# Altium PCB PCB_Switching_2022-05-04.pcbdoc
Units mm, origin at the board's own origin, x right, y up, seen from the top; angles counter-clockwise.
Board outline 185.17 x 149.14 mm, 2 copper layers (Top Layer, Bottom Layer); 16 components, 19 nets, 86 pads, 6 vias.
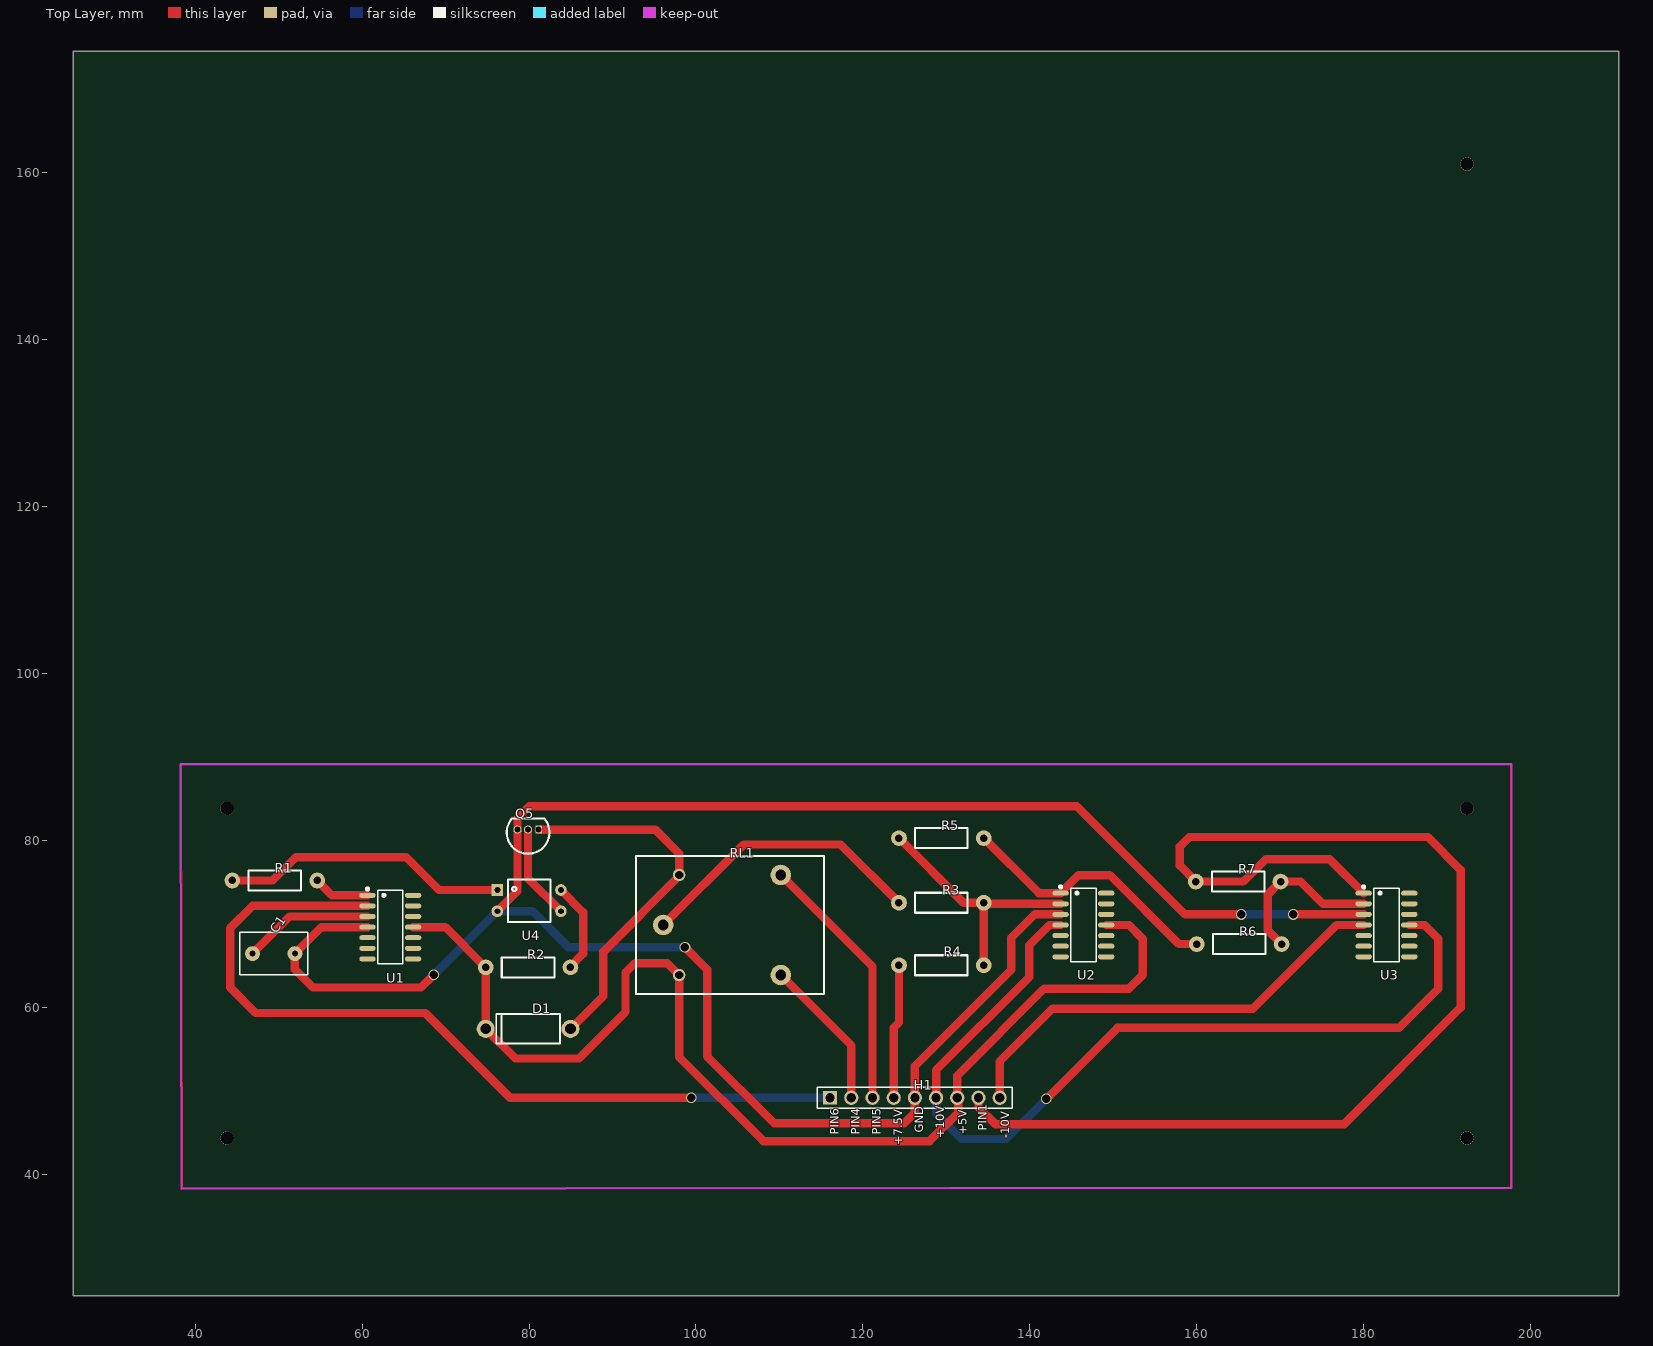
[diagram p0: Top Layer view]
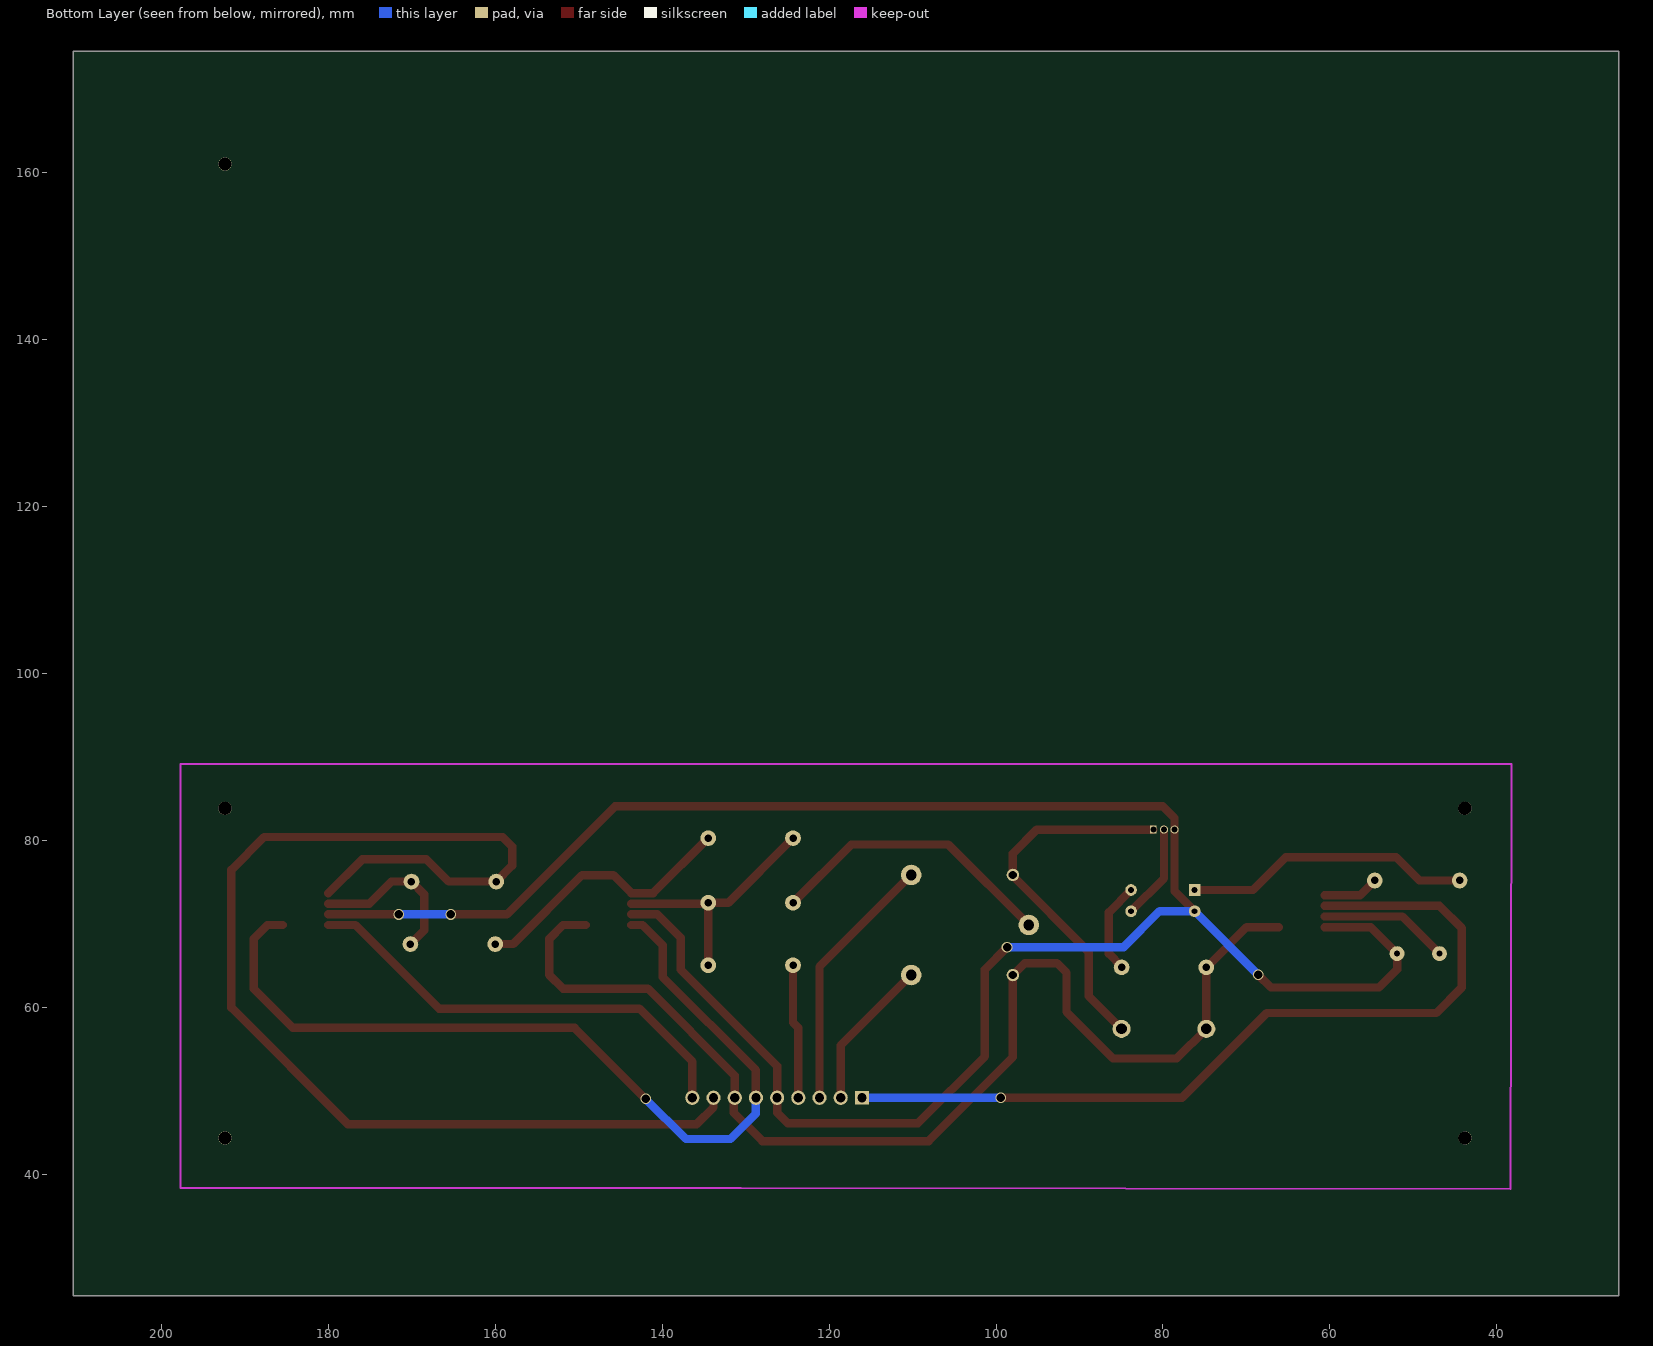
[diagram p1: Bottom Layer view, seen from below]

## Layer stack, top to bottom
Top Layer: signal copper (thickness not stored)
Dielectric: dielectric 0.32, FR-4, Dk 4.8
Bottom Layer: signal copper (thickness not stored)

## Board outline
210.566,25.4 25.4,25.4 25.4,174.536 210.566,174.536

## Components (designator, comment, footprint, x,y, rotation, side; value= is the part's Value field where it differs from the comment)
C1 "1.37V" RAD-0.2 49.403,66.421 r0 top
D1 "1N4007" DO-15 79.883,57.404 r180 top
H1 "Header-Female-2.54_1x9" HDR-TH_9P-P2.54-V-F-1 126.238,49.149 r0 top
Q5 "BC547" TO-92 79.883,81.28 r180 top
R1 "1k" AXIAL-0.4 49.53,75.184 r0 top
R2 "1k" AXIAL-0.4 79.883,64.77 r180 top
R3 "1k" AXIAL-0.4 129.413,72.517 r180 top
R4 "1k" AXIAL-0.4 129.413,65.024 r180 top
R5 "1k" AXIAL-0.4 129.413,80.264 r180 top
R6 "1k" AXIAL-0.4 165.1,67.564 r180 top
R7 "1k" AXIAL-0.4 164.973,75.057 r0 top
RL1 "Omron-G5LE-Relay_SPDT" ? 103.124,69.85 r0 top
U1 "LM324D" SO-14_L8.9-W3.9-P1.27-LS6.0-BL 63.373,69.596 r270 top
U2 "LM324D" SO-14_L8.9-W3.9-P1.27-LS6.0-BL 146.431,69.85 r270 top
U3 "LM324D" SO-14_L8.9-W3.9-P1.27-LS6.0-BL 182.753,69.85 r270 top
U4 "PC817" DIP4 80.01,72.771 r270 top

## Footprints (in the part's own frame and the unit in brackets; to place one, negate y for a bottom-side part, rotate by r counter-clockwise, add the part's x,y. Pads: shape width x height; smd on the part's side, far side on the other; paste and mask are expansions set on the pad)
AXIAL-0.4 [mil]
  round 74 hole 35.4: 1(-200,0) 2(200,0)
  silkscreen extent -124,-47 124,47
DIP4 [mil]
  rect 55x55 hole 28: 1(-50,-150)
  round 55 hole 28: 2(50,-150) 3(50,150) 4(-50,150)
  silkscreen extent -100,-100 100,100
DO-15 [mil]
  round 85 hole 50: 1(-200,0) 2(200,0)
  silkscreen extent -150,-70 150,70
HDR-TH_9P-P2.54-V-F-1 [mm]
  rect 1.7x1.575 hole 1.1: 1(-10.16,0)
  round 1.7 hole 1.1: 2(-7.62,0) 3(-5.08,0) 4(-2.54,0) 5(0,0) 6(2.54,0) 7(5.08,0) 8(7.62,0) 9(10.16,0)
  silkscreen extent -11.68,-1.27 11.68,1.27
RAD-0.2 [mil]
  round 70 hole 28: 1(100,0) 2(-100,0)
  silkscreen extent -160,-100 160,100
SO-14_L8.9-W3.9-P1.27-LS6.0-BL [mm]
  oval 0.595x1.968 smd: 1(-3.81,-2.734) 2(-2.54,-2.734) 3(-1.27,-2.734) 4(0,-2.734) 5(1.27,-2.734) 6(2.54,-2.734) 7(3.81,-2.734) 8(3.81,2.734) 9(2.54,2.734) 10(1.27,2.734) 11(0,2.734) 12(-1.27,2.734) 13(-2.54,2.734) 14(-3.81,2.734)
  silkscreen extent -4.71,-2.88 4.4,1.52
TO-92 [mil]
  rect 32x38 hole 28: 1(-50,0)
  round 39 hole 28: 2(0,0) 3(50,0)
  silkscreen extent -101,-53 100,114
? [mil]
  round 96.7 hole 51.18: 1(-277.5,0) 3(277.5,-236.2) 4(277.5,236.2)
  round 58.7 hole 39.37: 2(-202.5,-236.2) 5(-202.5,236.2)
  silkscreen extent -405,-325 480,325

## Free pads (board coordinates)
  round 1.6 hole 1.6: 2(43.815,44.323) 2(43.815,83.82) 2(192.405,44.323) 2(192.405,83.82) 2(192.405,161.036)

## Via types
v1: diameter 1.3, hole 1, Top Layer to Bottom Layer, tented both sides, 6 vias

## Nets (pads, with @x,y where several pads share a name; then routed paths per layer and width w, separated by ;. In a path a pad name is that pad's centre, name@x,y a point inside that pad or via, vN(x,y) a via of type N, cw(c..) or ccw(c..) an arc to the next point about the centre after c; other vN are vias at no path point)
+5V: D1.2 H1.7 R2.2 RL1.2 U1.11 U2.11 | length 140.8
  Top Layer w1: U1.11 69.977,69.596 R2.2 D1.2 78.359,53.848 85.979,53.848 91.567,59.436 91.567,64.135 92.71,65.278 96.553,65.278 RL1.2 97.98,54.038 108.077,43.942 128.016,43.942 131.445,47.371 131.445,49.022 H1.7 131.318,51.816 141.732,62.23 151.892,62.23 153.543,63.881 153.543,68.199 151.892,69.85 U2.11
+7.5V: H1.4 R4.2 | length 16.1
  Top Layer w1: H1.4 123.698,57.531 124.333,58.166 R4.2
+10V: H1.6 U2.4 U3.11 | length 108.6
  Top Layer w1: H1.6 128.778,52.451 139.954,63.627 139.954,67.437 142.367,69.85 U2.4 ; v1(141.986,49.022) 150.495,57.531 184.277,57.531 188.976,62.23 188.976,68.199 187.325,69.85 U3.11
  Bottom Layer w1: H1.6 128.778,47.244 131.826,44.196 137.16,44.196 v1(141.986,49.022)
-10V: H1.9 U3.4 | length 54.7
  Top Layer w1: H1.9 136.398,53.467 142.748,59.817 166.751,59.817 176.784,69.85 U3.4
C1_2: C1.2 U1.3 | length 15.6
  Top Layer w1: C1.2 51.308,70.866 U1.3
GND: C1.1 H1.5 Q5.3 U1.4 U2.3 U3.3 U4.2 | length 260.4
  Top Layer w1: U1.4 55.118,69.596 C1.1 51.943,64.516 54.102,62.357 67.056,62.357 v1(68.58,63.881) ; U4.2 78.613,73.914 Q5.3 78.613,82.677 80.01,84.074 145.669,84.074 158.623,71.12 v1(165.354,71.12) ; v1(98.679,67.183) 101.346,64.516 101.346,54.102 109.347,46.101 124.968,46.101 126.238,47.371 H1.5 126.238,52.959 137.795,64.516 137.795,68.326 140.589,71.12 U2.3 ; v1(171.577,71.12) U3.3
  Bottom Layer w1: v1(68.58,63.881) U4.2 80.391,71.501 84.709,67.183 v1(98.679,67.183) ; v1(165.354,71.12) v1(171.577,71.12)
NET1: R3.2 RL1.1 | length 35.1
  Top Layer w1: RL1.1 105.727,79.502 117.348,79.502 R3.2
PIN1: H1.8 R7.1 U3.1 | length 145.7
  Top Layer w1: H1.8 133.858,48.006 135.89,45.974 177.673,45.974 191.643,59.944 191.643,76.454 187.706,80.391 159.131,80.391 157.988,79.248 157.988,76.962 R7.1 165.608,75.057 168.275,77.724 175.956,77.724 U3.1
PIN4: H1.2 RL1.3 | length 18.2
  Top Layer w1: RL1.3 118.618,55.405 H1.2
PIN5: H1.3 RL1.4 | length 31.3
  Top Layer w1: RL1.4 121.158,64.864 H1.3
PIN6: H1.1 U1.2 | length 102
  Top Layer w1: U1.2 46.863,72.136 44.196,69.469 44.196,62.357 47.244,59.309 67.564,59.309 77.724,49.149 v1(99.441,49.149)
  Bottom Layer w1: v1(99.441,49.149) H1.1
Q5_1: D1.1 Q5.1 RL1.5 | length 44.5
  Top Layer w1: Q5.1 95.123,81.28 97.98,78.422 RL1.5 98.044,75.786 88.9,66.642 88.9,61.341 D1.1
Q5_2: Q5.2 U4.3 | length 11.4
  Top Layer w1: Q5.2 79.883,75.438 U4.3
U1_1: R1.2 U1.1 | length 6.8
  Top Layer w1: R1.2 56.388,73.406 U1.1
U2_1: R5.1 R6.2 U2.1 | length 32.6
  Top Layer w1: R5.1 141.097,73.66 U2.1 ; U2.1 145.857,75.819 149.606,75.819 157.861,67.564 R6.2
U2_2: R3.1 R4.1 R5.2 U2.2 | length 39.2
  Top Layer w1: R5.2 132.08,72.517 R3.1 134.62,72.39 U2.2 ; R4.1 134.493,72.39 U2.2
U3_2: R6.1 R7.2 U3.2 | length 19.9
  Top Layer w1: R6.1 168.529,69.215 168.529,73.533 R7.2 172.466,75.057 175.133,72.39 U3.2
U4_1: R1.1 U4.1 | length 34.5
  Top Layer w1: R1.1 49.276,75.184 52.07,77.978 65.278,77.978 69.215,74.041 U4.1
U4_4: R2.1 U4.4 | length 11
  Top Layer w1: U4.4 86.487,71.374 86.487,66.421 84.963,64.897 R2.1
pads on no net: U1.5 U1.6 U1.7 U1.8 U1.9 U1.10 U1.12 U1.13 U1.14 U2.5 U2.6 U2.7 U2.8 U2.9 U2.10 U2.12 U2.13 U2.14 U3.5 U3.6 U3.7 U3.8 U3.9 U3.10 U3.12 U3.13 U3.14

## Polygon pours and split planes (outlines as drawn)
GND on Top Layer (solid): 38.354,89.027 197.612,89.027 197.612,38.481 197.485,38.354 38.481,38.354

## Silkscreen, mask and mechanical layers (free items; w line width, h text height)
Top Overlay:
  text "PIN1" at 134.866,45.212 h1 r90
  text "GND" at 127.246,44.958 h1 r90
  text "PIN6" at 117.086,44.704 h1 r90
  text "PIN4" at 119.626,44.704 h1 r90
  text "PIN5" at 122.166,44.704 h1 r90
  text "+5V" at 132.453,44.704 h1 r90
  text "+10V" at 129.786,44.323 h1 r90
  text "-10V" at 137.533,44.323 h1 r90
  text "+7.5V" at 124.706,43.434 h1 r90